# Altium PCB Battery.PcbDoc
Units mil, origin at the board's own origin, x right, y up, seen from the top; angles counter-clockwise.
Board outline 1040 x 840 mil, 2 copper layers (Top Layer, Bottom Layer); 22 components, 18 nets, 70 pads, 33 vias.
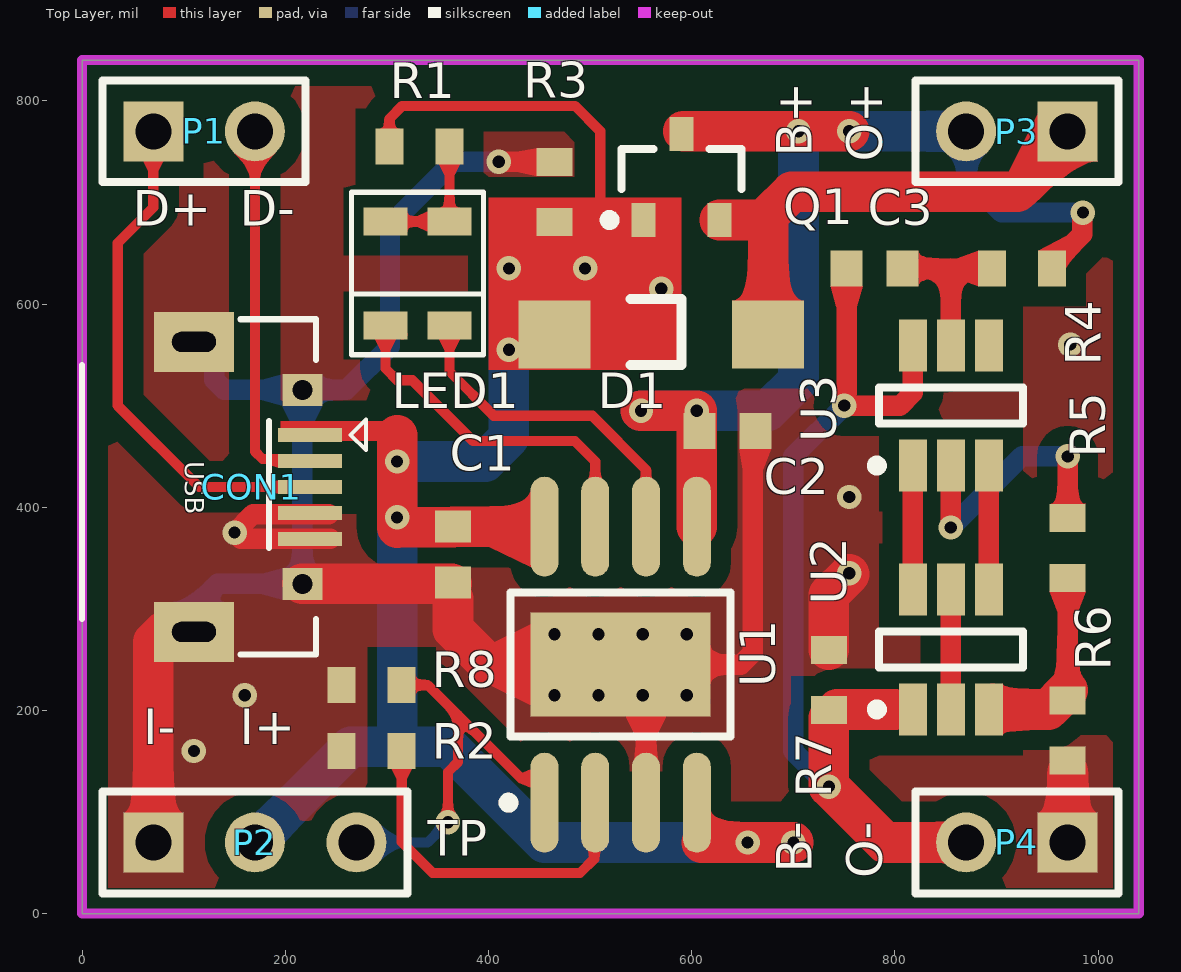
[diagram p0: Top Layer view]
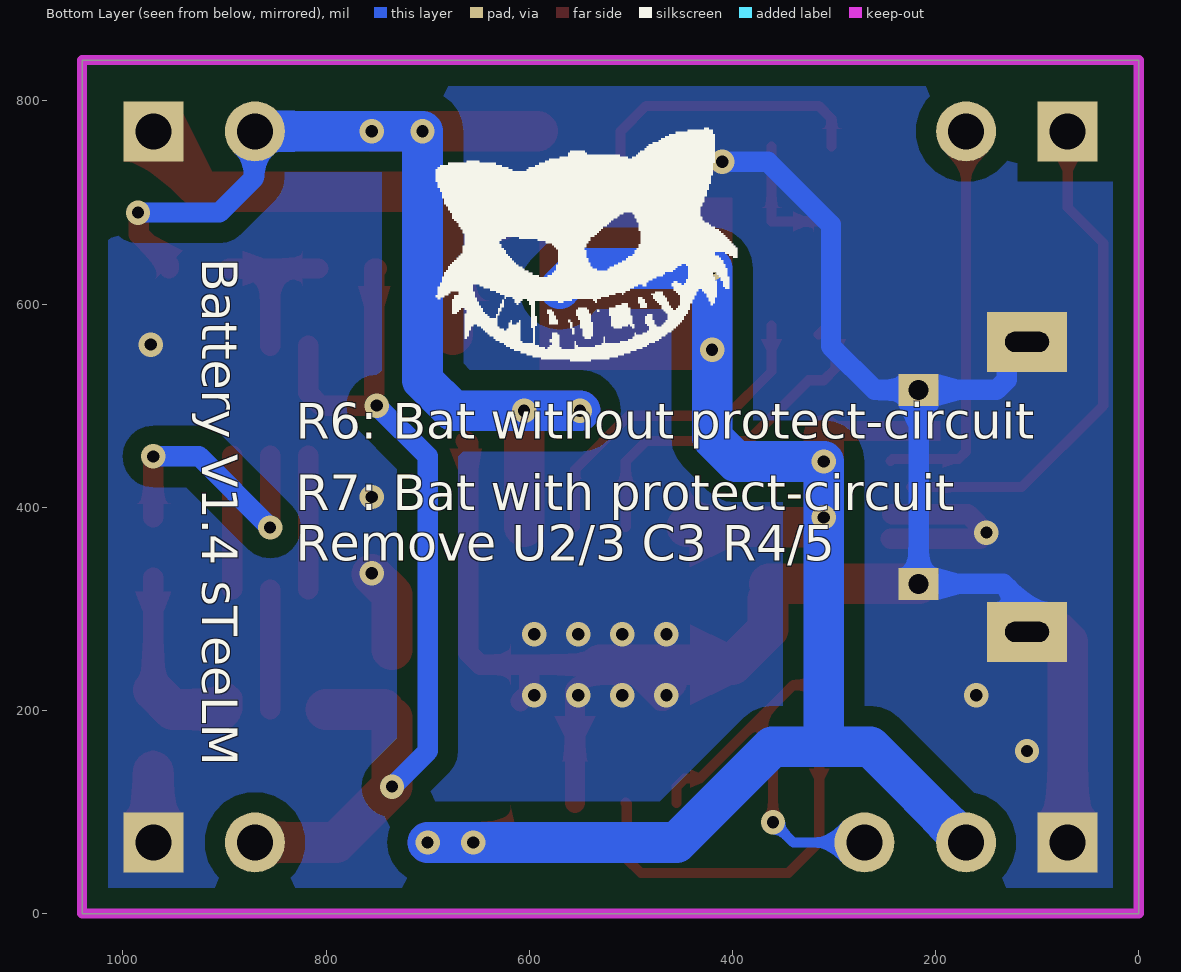
[diagram p1: Bottom Layer view, seen from below]

## Layer stack, top to bottom
Top Solder: solder mask 0.4, Solder Resist, Dk 3.5
Top Layer: signal copper 1.4
Dielectric 1: dielectric 12.6, FR-4, Dk 4.8
Bottom Layer: signal copper 1.4
Bottom Solder: solder mask 0.4, Solder Resist, Dk 3.5

## Board outline
0,0 0,840 1040,840 1040,0

## Design rules (kind name [scope] priority, off if disabled: settings)
Clearance [All] p1: gap=10 ignorepadtopadclearanceinfootprint=TRUE except(20: Track-Poly SMDPad-Poly THPad-Poly Fill-Poly Poly-Poly)
MinimumSolderMaskSliver MinimumSolderMaskSliver_SOP127P780-8M [HasFootprint('SOP127P780-8M') vs HasFootprint('SOP127P780-8M')] p1: minsoldermaskwidth=0.39
MinimumSolderMaskSliver MinimumSolderMaskSliver_RED_GREEN_LED1206 [HasFootprint('RED_GREEN_LED1206') vs HasFootprint('RED_GREEN_LED1206')] p2: minsoldermaskwidth=3.94
MinimumSolderMaskSliver MinimumSolderMaskSliver_SOT95P330-6M [HasFootprint('SOT95P330-6M') vs HasFootprint('SOT95P330-6M')] p3: minsoldermaskwidth=1.57
MinimumSolderMaskSliver MinimumSolderMaskSliver_USB [HasFootprint('USB-micro_B') vs HasFootprint('USB-micro_B')] p4: minsoldermaskwidth=3.54
MinimumSolderMaskSliver [All] p5: minsoldermaskwidth=10
PolygonConnect [All] p1: connectstyle=Direct reliefconductorwidth=10 reliefentries=4 polygonreliefangle="90 Angle" airgapwidth=10
RoutingVias [All] p1: holewidth=12.01 width=24.02 viastyle="Through Hole" minholewidth=12.01 minwidth=24.02 maxholewidth=12.01 maxwidth=24.02
SMDEntry SMDEntry_SOT95P330-6M [HasFootprint('SOT95P330-6M')] p1: side=TRUE corner=FALSE anyangle=FALSE
SMDEntry SMDEntry_SOP127P780-8M [HasFootprint('SOP127P780-8M')] p2: side=TRUE corner=TRUE anyangle=TRUE
SMDEntry [All] p3: side=TRUE corner=TRUE anyangle=TRUE
SilkToSolderMaskClearance SilkToSolderMaskClearance_RED_GREEN_LED1206 [HasFootprint('RED_GREEN_LED1206')] p1: minsilkscreentomaskgap=3.94 clearancetoexposedcopper=TRUE
SilkToSolderMaskClearance SilkToSolderMaskClearance_CD3216-1206 [HasFootprint('CD3216-1206')] p2: minsilkscreentomaskgap=7.87 clearancetoexposedcopper=TRUE
SilkToSolderMaskClearance SilkToSolderMaskClearance_USB [HasFootprint('USB-micro_B')] p3: minsilkscreentomaskgap=1.85 clearancetoexposedcopper=TRUE
SilkToSolderMaskClearance [IsPad] p4: minsilkscreentomaskgap=10 clearancetoexposedcopper=TRUE
SolderMaskExpansion [All] p1: expansion=4 istentingtop=FALSE
SupplyNets "Schematic Supply Nets_1" [InNet('+5')] p1: voltage=0.000
SupplyNets "Schematic Supply Nets" [InNet('GND')] p2: voltage=0.000
Width Width_Power [InNetClass('Power')] p1: maxlimit=50 minlimit=10 preferedwidth=40
Width [All] p2: maxlimit=20 minlimit=10 preferedwidth=10
28 further rules are at their usual default settings.

## Classes and differential pairs
net class Power: +5 BAT+ BAT- GND GND2 OUT+

## Components (designator, comment, footprint, x,y, rotation, side; value= is the part's Value field where it differs from the comment)
C1 "Cap" CAPC1608L 365,353.27 r90 top value=106
C2 "Cap" CAPC1608L 635,475 r0 top value=106
C3 "Cap" CAPC1608L 780,635 r0 top value=104
CON1 "USB-Micro" USB-micro_B 110,420 r270 top
D1 "SS12" DO-214AC 570,570 r0 top
LED1 "RED_GREEN_LED" RED_GREEN_LED1206 330,630 r90 top
P1 "Header 2" HDR1X2 70,770 r0 top
P2 "Header 3" HDR1X3 70,70 r0 top
P3 "Header 2" HDR1X2 970,770 r180 top
P4 "Header 2" HDR1X2 970,70 r180 top
Q1 "AO3401,A19T" SOT-23B_L 590,725 r90 top
R1 "Res2" RESC1608L 331.97,755 r180 top value=1K
R2 "Res2" RESC1608L 285,160 r0 top value=1.2K
R3 "Res2" RESC1608L 465,710 r270 top value=10K
R4 "Res2" RESC1608L 925,635 r180 top value=100R
R5 "Res2" RESC1608L 970,360 r90 top value=1K
R6 "Res2" RESC1608L 970,180 r270 top value=0R
R7 "Res2" RESC1608L 735,230 r90 top value=0R
R8 "Res2" RESC1608L 285,225 r0 top value=0R
U1 "TP4056" SOP127P780-8M 530,245 r90 top
U2 "8205A" SOT95P330-6M 855,260 r90 top
U3 "DW01A" SOT95P330-6M 855,500 r90 top

## Footprints (in the part's own frame and the unit in brackets; to place one, negate y for a bottom-side part, rotate by r counter-clockwise, add the part's x,y. Pads: shape width x height; smd on the part's side, far side on the other; paste and mask are expansions set on the pad)
CAPC1608L [mm] "Chip Capacitor, Body 1.6x0.8mm, IPC High Density"
  rect 0.8x0.9 smd: 1(-0.7,0) 2(0.7,0)
  body extent -0.87,-0.48 0.87,0.48, height 0.85
DO-214AC [mm] "DO-214AC"
  rect 1.8x1.7 smd: 1(-2.67,0) 2(2.67,0)
  silkscreen extent -0.76,-0.76 0.51,0.89, body extent -2.41,-1.4 2.41,1.4, height 2.5
HDR1X2 [mm] "Connector; Header; 2 Position"
  rect 1.5x1.5 hole 0.9: 1(0,0)
  round 1.5 hole 0.9: 2(2.54,0)
  silkscreen extent -1.27,-1.27 3.81,1.27
HDR1X3 [mm] "Connector; Header; 3 Position"
  rect 1.5x1.5 hole 0.9: 1(0,0)
  round 1.5 hole 0.9: 2(2.54,0) 3(5.08,0)
  silkscreen extent -1.27,-1.27 6.35,1.27
RED_GREEN_LED1206 [mm]
  rect 0.7x1.1 smd: 1(-1.3,0.8) 2(-1.3,-0.8) 3(1.3,-0.8) 4(1.3,0.8)
  silkscreen extent -2.03,-1.65 2.03,1.65
RESC1608L [mm] "Chip Resistor, Body 1.6x0.8mm, IPC High Density"
  rect 0.7x0.9 smd: 1(-0.75,0) 2(0.75,0)
  body extent -0.85,-0.48 0.85,0.48, height 0.6
SOP127P780-8M [mm] "SOP, 8-Leads, Body 5.3x5.3mm, Pitch 1.27mm, IPC Low Density"
  oval 2.5x0.7 smd: 1(-3.45,1.905) 2(-3.45,0.635) 3(-3.45,-0.635) 4(-3.45,-1.905) 5(3.45,-1.905) 6(3.45,-0.635) 7(3.45,0.635) 8(3.45,1.905)
  rect 2.6x4.5 smd: 9(0,0)
  silkscreen extent -3.57,-2.75 1.8,2.93, body extent -2.73,-2.75 2.73,2.75, height 2.03
SOT95P330-6M [mm]
  rect 1.3x0.7 smd: 1(-1.5,0.95) 2(-1.5,0) 3(-1.5,-0.95) 4(1.5,-0.95) 5(1.5,0) 6(1.5,0.95)
  silkscreen extent -1.62,-1.8 0.45,1.97, body extent -1.2,-1.8 1.2,1.8
SOT-23B_L [mm] "SOT23, 3-Leads, Body 2.9x1.3mm, Pitch 0.95mm, Lead Span 2.4mm, IPC High Density"
  rect 0.85x0.6 smd: 1(-1.075,0.95) 2(-1.075,-0.95) 3(1.075,0)
  silkscreen extent -1.2,-1.5 0.7,1.92, body extent -0.7,-1.5 0.7,1.5, height 1.14
USB-micro_B [mm] "micro型USB ，5.7*7.8*2.5mm"
  rect 0.35x1.6 smd: 1(-1.3,2.9) 2(-0.65,2.9) 3(0,2.9) 4(0.65,2.9) 5(1.3,2.9)
  rect 1.5x2 hole 0.5 slot 1.1 at 90 deg: 5(-3.625,0) 5(3.625,0)
  rect 0.8x1 hole 0.5: 5(-2.425,2.71) 5(2.425,2.71)
  silkscreen extent -4.19,-2.79 4.19,4.3, body extent -4,-2.71 4,2.89, height 2.8

## Part data
C1 C2 C3: "Capacitor", LatestRevisionDate=17-Jul-2002, LatestRevisionNote="Re-released for DXP Platform.", PackageDescription="Radial Cap, Thru-Hole; 2 Leads; 0.3 in Pin Spacing", PackageReference=RAD-0.3, Published=8-Jun-2000, Publisher="Altium Limited"
D1: library part Diode, "1N4148", Code_JEDEC=DO-214-AB, LatestRevisionDate=17-Jul-2002, LatestRevisionNote="Re-released for DXP Platform.", PackageDescription="DO-214-AB/SMC; 2 C-Bend Leads; Body 7.9 x 5.9 mm, inc. leads (LxW)", PackageReference=SMC, PackageVersion=Sep-1996, Published=8-Jun-2000, Publisher="Altium Limited"
P1 P3 P4: "Header, 2-Pin", LatestRevisionDate=17-Jul-2002, LatestRevisionNote="Re-released for DXP Platform.", Publisher="Altium Limited"
P2: "Header, 3-Pin", LatestRevisionDate=17-Jul-2002, LatestRevisionNote="Re-released for DXP Platform.", Publisher="Altium Limited"
Q1: library part PMOS-2, "P-Channel Power MOSFET", ComponentLink1Description="Manufacturer Link", ComponentLink1URL=http://www.irf.com/, DatasheetVersion=PD-9.390D, LatestRevisionDate=17-Jul-2002, LatestRevisionNote="Re-released for DXP Platform.", Note="Pin 4 not drawn and electrically connected to Pin 2.", PackageDescription="TO, Thru-Hole, Vertical, Heatsink Mounted; 3 In-Line Leads; Pitch 2.54 mm", PackageReference=TO-220AB, PackageVersion=Feb-1997, Published=8-Jun-2000, Publisher="Altium Limited"
R1 R2 R3 R4 R5 R6 R7 R8: "Resistor", LatestRevisionDate=17-Jul-2002, LatestRevisionNote="Re-released for DXP Platform.", PackageDescription="Axial Device, Thru-Hole; 2 Leads; 0.4 in Pin Spacing", PackageReference=AXIAL-0.4, Published=8-Jun-2000, Publisher="Altium Limited"

## Via types
v1: diameter 24.02, hole 12.01, Top Layer to Bottom Layer, 33 vias

## Nets (pads, with @x,y where several pads share a name; then routed paths per layer and width w, separated by ;. In a path a pad name is that pad's centre, name@x,y a point inside that pad or via, vN(x,y) a via of type N, cw(c..) or ccw(c..) an arc to the next point about the centre after c; other vN are vias at no path point)
+5: C1.2 CON1.1 D1.1 P2.2 Q1.1 R1.2 R3.2 U1.4 U1.8 | length 2407.2
  Top Layer w10: R1.2 302.44,782.44 315,795 485,795 510,770 510,682.68
  Top Layer w20: C1.2@364.59,380.41 C1.2
  Top Layer w40: v1@310,380 v1(310,390) v1(310,445) 310,470.67 ; v1@310.41,380.41 C1.2@364.59,380.41 ; C1.2 U1.8@445,380.83 ; D1.1@451.42,583.46 465,583.46 R3.2 ; Q1.1 550.39,680.47 R3.2 ; v1(570,615) 549.53,635.47 420,635.47 R3.2 ; U1.4@610,70 v1(655,70) v1(700,70)
  Bottom Layer w40: P2.2 264.31,164.31 360.69,164.31 455,70 v1(655,70) v1(700,70) ; 310,165 310,245 v1(310,390) v1(310,445) 396.57,445 420,468.43 v1(420,555) v1(420,635) 550,635 v1(570,615)
  other v1: 495,635
BAT+: C2.1 P3.2 Q1.3 R4.1 U1.5 | length 1155.3
  Top Layer w20: Q1.3 590,768.19 Q1.3@591.81,770 ; R4.1 954.53,638.94 984.23,668.64 984.23,689.23 v1(985,690)
  Top Layer w40: v1(550,495) v1(605,495) U1.5 ; Q1.3@591.81,770 v1(705,770) v1(755,770)
  Bottom Layer w20: P3.2@870.81,769.19 870.81,724.19 905,690 v1(985,690)
  Bottom Layer w40: v1(550,495) v1(605,495) 675,495 705,525 v1(705,770) v1(755,770) P3.2 P3.2@870.81,769.19
BAT-: C3.1 P4.2 R7.1 U2.1 U3.6 | length 964.9
  Top Layer w20: R7.1@738.94,200.47 R7.1 735,192.76 R7.1@743.19,200.94 ; R7.1@742.72,192.76 R7.1@742.72,196.69 ; v1(750,500) 805,500 817.6,512.6 U3.6 ; 752.44,512.56 752.44,632.56 750,635 C3.1
  Top Layer w40: R7.1@735,192.76 v1(735,125) 790,70 P4.2 ; R7.1@743.19,200.94 800,200.94
  Bottom Layer w20: v1(735,125) 700,160 700,450 v1(750,500)
D+: CON1.3 P1.1 | length 506.8
  Top Layer w10: P1.1 70,695 35,660 35,500 115,420 CON1.3
D-: CON1.2 P1.2 | length 399.3
  Top Layer w10: P1.2 170,455 177.52,447.48 242.28,447.48 CON1.2@244.17,445.59
  Bottom Layer w10: P1.2@165.58,765.58 P1.2
GND: C1.1 C2.2 CON1.4 CON1.5 P2.1 P4.1 R2.1 R3.1 R6.2 R7.2 R8.1 U1.3 U1.9 | length 2433.8
  Top Layer w10: U1.9 551.67,223.33 v1(551.67,215)
  Top Layer w20: CON1.4@242.87,393.11 168.11,393.11 v1(150,375) 156.18,368.82 224.17,368.82 CON1.5@244.17,368.82 ; C1.1@365,310 C1.1 ; v1(410,740) R3.1@452.57,740 ; U1.9@455,225 v1(465,215) ; U1.9@467.41,209.41 470.59,209.41 U1.9@500.59,239.41 ; U1.9 U1.9@600,245 ; U1.9@551.67,223.33 555,220 U1.3 ; U1.9@608.58,208.91 600,217.49 U1.9@600,245 ; C2.2@662.33,465.23 660.12,463.02 660.12,256.72 648.4,245 U1.9@600,245 ; v1@755,333.91 v1(755,335) ; P4.1@968.41,71.59 P4.1 ; R6.2@970,140 R6.2
  Top Layer w40: P2.1 70,267.28 80,277.28 CON1.5@110,277.28 ; CON1.5@216.69,324.53 C1.1@363.82,324.53 ; C1.1@365,310 365,280 400,245 U1.9 ; R7.2 735,313.91 v1@755,333.91 ; P4.1 R6.2@970,140
  Bottom Layer w20: CON1.5@110,277.28 110,301.1 133.43,324.53 151.09,324.53 216.69,324.53 CON1.5@216.69,515.47 ; CON1.5@130,562.72 130,525.47 140,515.47 CON1.5@216.69,515.47 ; v1(410,740) 365,740 303,678 303,558.47 260,515.47 CON1.5@216.69,515.47
  other v1: 110,160 160,215 508.33,215 595,215 465,275 508.33,275 551.67,275 595,275 755,410 972.47,560.08
GND2: R5.1 R6.1 U2.3 | length 228.6
  Top Layer w20: U2.3 892.4,212.75 U2.3@896.18,216.53 ; R5.1 970,220 970,213.31 973.78,209.53 973.78,223.78
  Top Layer w40: U2.3@903.19,200.94 950.94,200.94 R6.1@970,220
NetC3_2: C3.2 R4.2 U3.5 | length 163.9
  Top Layer w20: C3.2 855,635 ; U3.5 855,635 ; R4.2 855,635
NetLED1_1: LED1.1 U1.7 | length 371.2
  Top Layer w10: LED1.1@315.16,570.04 306.38,578.82 LED1.1 298.5,536.5 310,525 325,525 385,465 485,465 505,445 U1.7
NetLED1_2: LED1.2 U1.6 | length 335
  Top Layer w10: LED1.2 361.5,533.5 405,490 502.01,490 555,437.01 U1.6
NetLED1_3: LED1.3 LED1.4 R1.1 | length 136.8
  Top Layer w10: LED1.4 LED1.3 R1.1
NetR2_2: R2.2 U1.2 | length 353
  Top Layer w10: R2.2 314.53,70.47 345,40 490,40 504.02,54.02 504.02,108.19 U1.2
NetR5_2: R5.2 U3.2 | length 274.9
  Top Layer w20: v1(855,380) U3.2 U3.2@855,450.94 ; R5.2@970,390 v1(970,450)
  Bottom Layer w20: v1(855,380) 925,450 v1(970,450)
NetU2_2: U2.2 U2.5 | length 118.1
  Top Layer w20: U2.2 U2.5
NetU2_4: U2.4 U3.3 | length 131.9
  Top Layer w20: U2.4 U3.3@892.4,450.94
NetU2_6: U2.6 U3.1 | length 131.9
  Top Layer w20: U2.6 U3.1@817.6,450.94
OUT+: D1.2 P3.1 Q1.2 | length 501.7
  Top Layer w40: Q1.2 670.76,682.68 675.12,687.04 ; D1.2 675.12,687.04 ; P3.1 960.47,760.47 960.47,750.47 920.47,710.47 698.55,710.47 675.12,687.04
TEMP: P2.3 R8.2 U1.1 | length 405
  Top Layer w10: R8.2 340,225 370,195 ; v1(360,90) 360,139.4 370,149.4 370,195 ; U1.1 455,124.81 446.89,132.92 432.08,132.92 370,195
  Bottom Layer w10: P2.3 340,70 v1(360,90)
pads on no net: U3.4

## Polygon pours and split planes (outlines as drawn)
GND on Bottom Layer "GND_L02_P003" (solid, remove dead copper, pour order 3): 0,0 0,840 1040,840 1040,0
GND on Top Layer "GND_L01_P002" (solid, remove dead copper, pour order 2): 0,0 0,840 1040,840 1040,0

## Keep-outs
Keep-Out Layer:
  the board outline again, w10

## Other copper
Top Layer:
  rectangle net +5: 400,535 590,705
  rectangle net +5: 195,465 310,485
  pour cut-out: 515,15 515,140 600,140 600,15

## Silkscreen, mask and mechanical layers (free items; w line width, h text height)
Top Overlay:
  text "B+" at 730,745 h60 r90
  text "O+" at 799.37,740 h60 r90
  text "D+" at 50,665 h60
  text "D-" at 155,665 h60
  text "I-" at 60,155 h60
  text "I+" at 155,155 h60
  text "TP" at 340,45 h60
  text "B-" at 730,40 h60 r90
  text "O-" at 799.37,35 h60 r90
Bottom Overlay:
  drawing of 9 lines, arcs and shapes, not listed
  text "Battery V1.4 sTeeLM" at 933.69,645 h60 r90
  text "R6: Bat without protect-circuit" at 830,455.68 h60
  text "R7: Bat with protect-circuit" at 830,385 h60
  text "Remove U2/3 C3 R4/5" at 830,335.63 h60
Bottom Solder:
  rectangle: 420,175 640,320
Mechanical 15:
  lines w10: 515,15 600,15 600,145 515,145 515,15

## Text inside footprints (layer, text, board x,y; h text height)
CON1: Top Overlay "USB" at 95,445 h32 r270